# EAGLE board PIC32 dev board (EAGLE 6.5.0)
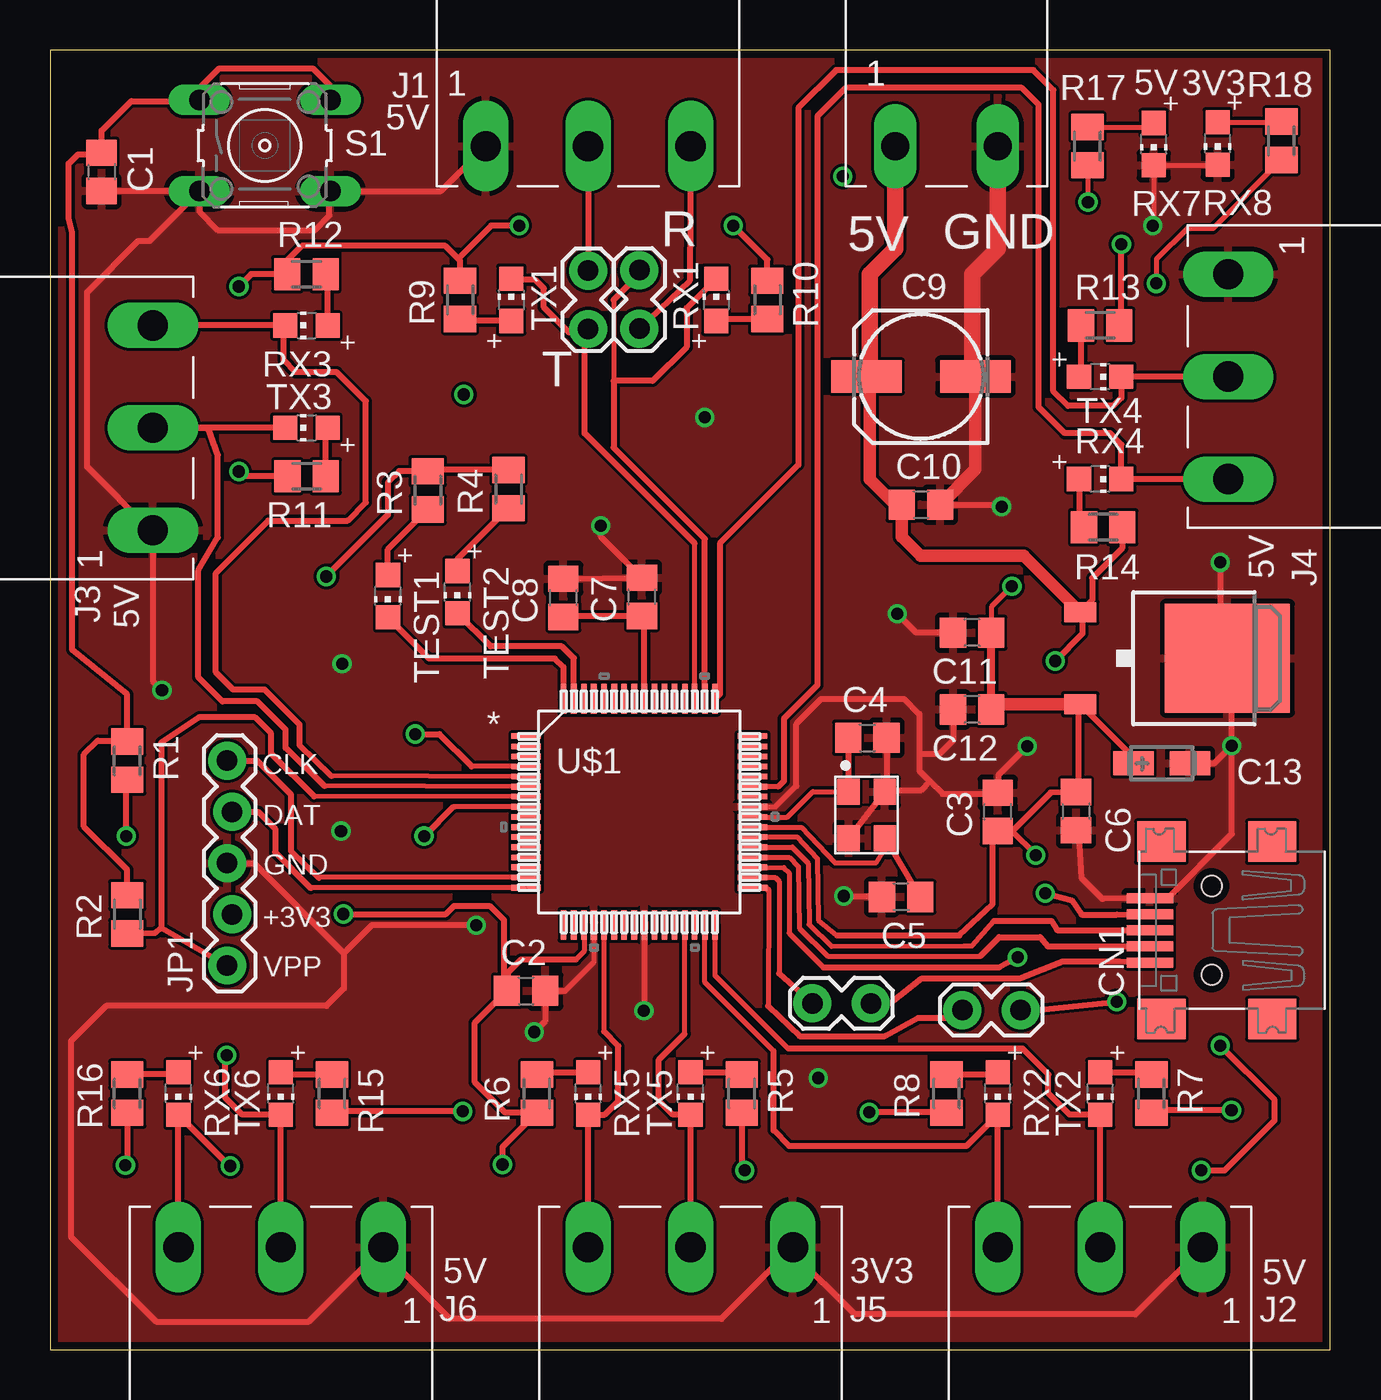
[diagram p0: board, top side]
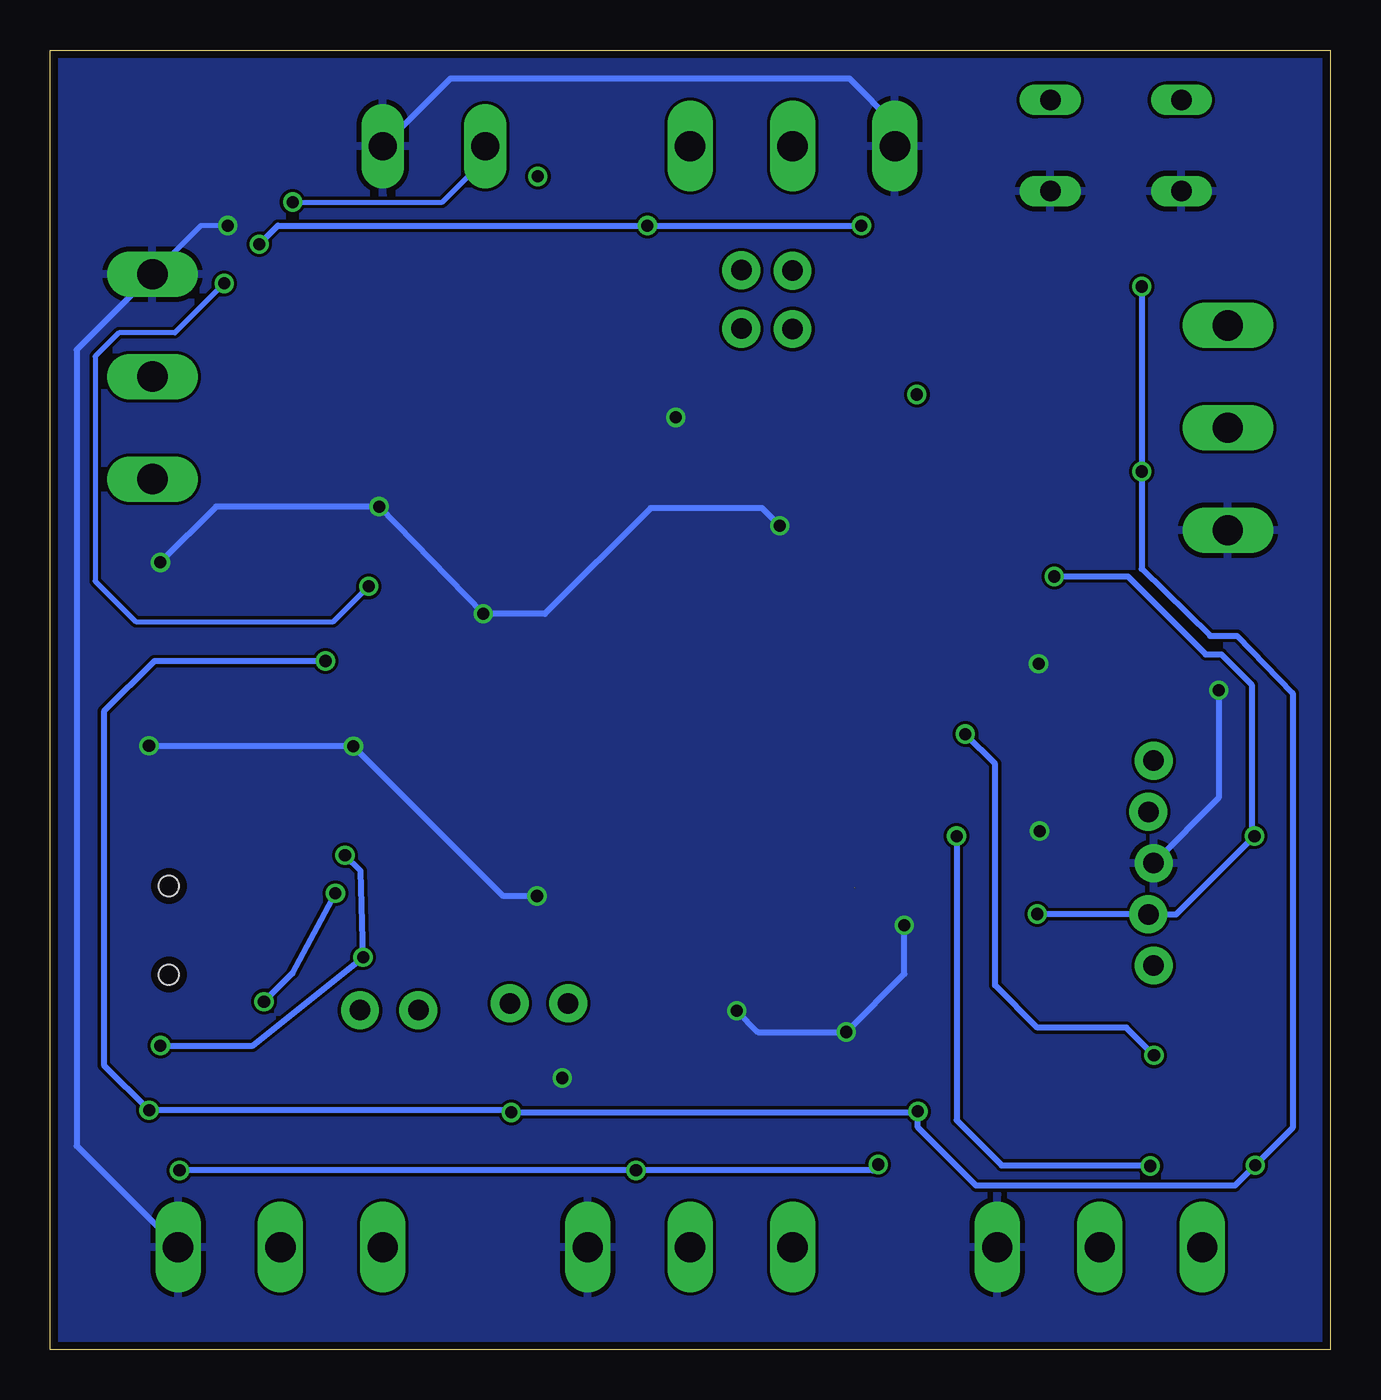
[diagram p1: board, bottom side, seen from below]

Size 63.48 x 64.44 mm. Coordinates in mm from the lower left corner, seen from the top.
Outline: 0,0 63.48,0 63.48,64.44 0,64.44 0,0
Copper layers (1*16): Top 0.0356mm / dielectric 1.5011mm / Bottom 0.0356mm
Design rules "LaenPCBOrder": minimum track width 6mil, minimum drill 13mil, track to track 6mil, track to pad 6mil, pad to pad 6mil, via to via 6mil, smd to smd 6mil, copper to edge 15mil, drill to drill 6mil, minimum pad ring 7mil, minimum via ring 7mil, stop-mask expansion 3mil, vias tented up to drill 0mil, thermal gap 10mil

## Footprints (pad centres in the part's own frame; a part is rotated, then mirrored left to right if it is on the bottom)
C0805 = smd 1.3 x 1.5: 1 -0.95,0; 2 0.95,0
153CLV-0605 = smd 3.5 x 1.6: + 2.7,0; - -2.7,0
CT3216 = smd 2 x 1.2: + -1.4,0; - 1.4,0
USB-MINIB = smd 0.5 x 2.308: D+ 0,4.064; D- -0.8,4.064; GND 1.6,4.064; ID 0.8,4.064; VBUS -1.6,4.064 | smd 2 x 2.4: GND1 -4.4,-2; GND2 -4.4,3.5; GND3 4.4,3.5; GND4 4.4,-2 | hole 1: -2.2,1; 2.2,1
ECX-32 = smd 1.3 x 1.1: 1 -1.15,-0.9; 2 1.15,-0.9; 3 1.15,0.9; 4 -1.15,0.9
M3 = drill 1.5 long: 1 -5.08,0; 2 0,0; 3 5.08,0
M2 = drill 1.4 long: 1 -2.54,0; 2 2.54,0
1X05_LOCK = drill 1.016 pad 1.88: 1 0,0.127; 2 2.54,-0.127; 3 5.08,0.127; 4 7.62,-0.127; 5 10.16,0.127
1X02_LOCK = drill 1.016 pad 1.88: 1 -0.178,0; 2 2.718,0
M0805 = smd 1.3 x 1.6: 1 -0.95,0; 2 0.95,0
CHIP-LED0805 = smd 1.2 x 1.2: A 0,-1.05; C 0,1.05
B3F-10XX = drill 1.016 long: 1 -3.251,2.261; 2 3.251,2.261; 3 -3.251,-2.261; 4 3.251,-2.261
TQFP64_10X10MC = smd 1.473 x 0.279: 1 -5.613,3.759; 2 -5.613,3.251; 3 -5.613,2.743; 4 -5.613,2.261; 5 -5.613,1.753; 6 -5.613,1.245; 7 -5.613,0.762; 8 -5.613,0.254; 9 -5.613,-0.254; 10 -5.613,-0.762; 11 -5.613,-1.245; 12 -5.613,-1.753; 13 -5.613,-2.261; 14 -5.613,-2.743; 15 -5.613,-3.251; 16 -5.613,-3.759; 33 5.613,-3.759; 34 5.613,-3.251; 35 5.613,-2.743; 36 5.613,-2.261; 37 5.613,-1.753; 38 5.613,-1.245; 39 5.613,-0.762; 40 5.613,-0.254; 41 5.613,0.254; 42 5.613,0.762; 43 5.613,1.245; 44 5.613,1.753; 45 5.613,2.261; 46 5.613,2.743; 47 5.613,3.251; 48 5.613,3.759 | smd 0.279 x 1.473: 17 -3.759,-5.613; 18 -3.251,-5.613; 19 -2.743,-5.613; 20 -2.261,-5.613; 21 -1.753,-5.613; 22 -1.245,-5.613; 23 -0.762,-5.613; 24 -0.254,-5.613; 25 0.254,-5.613; 26 0.762,-5.613; 27 1.245,-5.613; 28 1.753,-5.613; 29 2.261,-5.613; 30 2.743,-5.613; 31 3.251,-5.613; 32 3.759,-5.613; 49 3.759,5.613; 50 3.251,5.613; 51 2.743,5.613; 52 2.261,5.613; 53 1.753,5.613; 54 1.245,5.613; 55 0.762,5.613; 56 0.254,5.613; 57 -0.254,5.613; 58 -0.762,5.613; 59 -1.245,5.613; 60 -1.753,5.613; 61 -2.261,5.613; 62 -2.743,5.613; 63 -3.251,5.613; 64 -3.759,5.613
TO-252 = smd 5.4 x 6.2: GROUND 0,2.5 | smd 1 x 1.6: INPUT -2.28,-4.8; OUTPUT 2.28,-4.8

## Placement (x,y rotation side)
C1  0.1 uF ceramic 50v  [C0805]  2.54,58.42 270 top
C2  0.1 uF ceramic 50v  [C0805]  23.59,17.8 0 top
C3  0.1 uF ceramic 50v  [C0805]  46.99,26.67 90 top
C4  30 pF ceramic 50v  [C0805]  40.52,30.34 0 top
C5  30 pF ceramic 50v  [C0805]  42.2,22.45 180 top
C6  0.1 uF ceramic 50v  [C0805]  50.87,26.71 270 top
C7  0.1 uF ceramic 50v  [C0805]  29.34,37.33 90 top
C8  optional 10 uF ceramic 50v  [C0805]  25.44,37.29 90 top
C9  100 uF aluminum 16v  [153CLV-0605]  43.18,48.26 180 top
C10  0.1 uF ceramic 50v  [C0805]  43.18,41.91 0 top
C11  0.1 uF ceramic 50v  [C0805]  45.72,35.56 180 top
C12  optional 0.1 uF ceramic 50v  [C0805]  45.72,31.75 180 top
C13  10uF tantilum 16v  [CT3216]  55.12,29.08 0 top
CN1  [USB-MINIB]  58.6,20.8 90 top
ECS-240-20-33-TR  CRYSTAL  [ECX-32]  40.49,26.52 270 top
J1  EUROMAG-390DEG  [M3]  26.67,59.69 0 top
J2  EUROMAG-390DEG  [M3]  52.07,5.08 180 top
J3  EUROMAG-390DEG  [M3]  5.08,45.72 90 top
J4  EUROMAG-390DEG  [M3]  58.42,48.26 270 top
J5  EUROMAG-390DEG  [M3]  31.75,5.08 180 top
J6  EUROMAG-390DEG  [M3]  11.43,5.08 180 top
J7  EUROMAG-290DEG  [M2]  44.45,59.69 0 top
JP1  [1X05_LOCK]  8.89,19.05 90 top
JP2  M02LOCK  [1X02_LOCK]  47.95,16.84 180 top
JP3  M02LOCK  [1X02_LOCK]  29.21,50.82 90 top
JP4  M02LOCK  [1X02_LOCK]  26.67,53.34 270 top
JP5  M02LOCK  [1X02_LOCK]  40.51,17.17 180 top
R1  10K  [M0805]  3.81,29.21 270 top
R2  499R  [M0805]  3.81,21.59 90 top
R3  330R  [M0805]  18.72,42.62 90 top
R4  330R  [M0805]  22.72,42.68 90 top
R5  665R  [M0805]  34.29,12.7 270 top
R6  665R  [M0805]  24.13,12.7 270 top
R7  1K  [M0805]  54.61,12.7 270 top
R8  1K  [M0805]  44.45,12.7 270 top
R9  1K  [M0805]  20.32,52.07 90 top
R10  1K  [M0805]  35.56,52.07 90 top
R11  1K  [M0805]  12.71,43.32 180 top
R12  1K  [M0805]  12.7,53.34 180 top
R13  1K  [M0805]  52.07,50.8 0 top
R14  1K  [M0805]  52.21,40.79 0 top
R15  1K  [M0805]  13.97,12.7 270 top
R16  1K  [M0805]  3.81,12.7 270 top
R17  1K  [M0805]  51.44,59.69 270 top
R18  665R  [M0805]  61.06,59.96 270 top
RX1  Green  [CHIP-LED0805]  33.02,52.07 0 top
RX2  Green  [CHIP-LED0805]  46.99,12.7 180 top
RX3  Green  [CHIP-LED0805]  12.7,50.8 90 top
RX4  Green  [CHIP-LED0805]  52.07,43.18 270 top
RX5  Green  [CHIP-LED0805]  26.67,12.7 180 top
RX6  Green  [CHIP-LED0805]  6.35,12.7 180 top
RX7  Green  [CHIP-LED0805]  54.72,59.79 180 top
RX8  Green  [CHIP-LED0805]  57.89,59.82 180 top
S1  [B3F-10XX]  10.64,59.73 0 top
TEST1  Blue  [CHIP-LED0805]  16.74,37.37 180 top
TEST2  Blue  [CHIP-LED0805]  20.19,37.57 180 top
TX1  Red  [CHIP-LED0805]  22.86,52.07 0 top
TX2  Red  [CHIP-LED0805]  52.07,12.7 180 top
TX3  Red  [CHIP-LED0805]  12.7,45.72 90 top
TX4  Red  [CHIP-LED0805]  52.07,48.26 270 top
TX5  Red  [CHIP-LED0805]  31.75,12.7 180 top
TX6  Red  [CHIP-LED0805]  11.43,12.7 180 top
U$1  PIC32MX575F512H-X_PT  [TQFP64_10X10MC]  29.21,26.67 0 top
U$2  LP2950  [TO-252]  55.88,34.29 270 top

## Library data of the parts
C1-C13 R1-R18 = rcl
CN1 RX1-RX8 TEST1 TEST2 TX1-TX6 = adafruit
ECS-240-20-33-TR = Crystal ECS
J1-J7 U$2 = NASA_LIB
JP1-JP5 = SparkFun-Connectors
S1 = switch-omron; MPN: B3F-1000; OC_FARNELL: 176432; OC_NEWARK: 36M3542
U$1 = Pic32

## Nets
+3V3: C2.1 C3.1 C6.1 C11.1 C12.1 C13.+ JP1.2 R1.2 R3.2 R4.2 R5.2 R6.2 R18.2 U$1.19 U$1.35 U$1.38 U$2.OUTPUT
+5V: C9.+ C10.1 J7.1 R7.2 R8.2 R9.2 R10.2 R11.2 R12.2 R13.2 R14.2 R15.2 R16.2 R17.2 U$2.INPUT
GND: C1.2 C2.2 C3.2 C4.2 C5.2 C6.2 C7.2 C8.2 C9.- C10.2 C11.2 C12.2 C13.- CN1.GND ECS-240-20-33-TR.2 ECS-240-20-33-TR.4 J1.1 J2.1 J3.1 J4.1 J5.1 J6.1 J7.2 JP1.3 RX7.C RX8.C S1.3 S1.4 U$1.20 U$1.25 U$1.41 U$2.GROUND
N$1: J5.2 TX5.C U$1.29
N$2: J5.3 RX5.C U$1.21
N$3: J1.2 JP4.1
N$4: J1.3 JP3.1
N$5: J4.2 TX4.C U$1.49
N$6: JP3.2 RX1.C U$1.50
N$7: J2.2 TX2.C U$1.32
N$8: J2.3 RX2.C U$1.31
N$9: J3.2 TX3.C U$1.6
N$10: J3.3 RX3.C U$1.5
N$11: J6.2 TX6.C U$1.4
N$12: J6.3 RX6.C U$1.8
N$13: JP1.1 R2.1 U$1.7
N$14: JP1.4 U$1.16
N$15: JP1.5 U$1.15
N$16: C1.1 R1.1 R2.2 S1.1 S1.2
N$17: C7.1 C8.1 U$1.56
N$18: C4.1 ECS-240-20-33-TR.1 U$1.40
N$19: C5.1 ECS-240-20-33-TR.3 U$1.39
N$20: CN1.D+ U$1.37
N$21: CN1.D- U$1.36
N$22: CN1.VBUS JP5.1
N$23: CN1.ID JP2.1
N$24: TEST2.C U$1.63
N$25: TEST1.C U$1.64
N$26: R3.1 TEST1.A
N$27: R4.1 TEST2.A
N$28: R5.1 TX5.A
N$29: R6.1 RX5.A
N$30: R7.1 TX2.A
N$31: R8.1 RX2.A
N$32: R9.1 TX1.A
N$33: R10.1 RX1.A
N$34: R11.1 TX3.A
N$35: R12.1 RX3.A
N$36: R13.1 TX4.A
N$37: R14.1 RX4.A
N$38: R15.1 TX6.A
N$39: R16.1 RX6.A
N$40: JP2.2 U$1.33
N$41: JP4.2 TX1.C U$1.51
N$42: J4.3 RX4.C U$1.43
N$43: JP5.2 U$1.34
N$46: R17.1 RX7.A
N$47: R18.1 RX8.A

## Tracks (layer width: path | path; a pad name or v marks a point on that pad's centre or on a via)
+3V3  (via drill 0.6)
  Top 0.254: U$1.38 37.02,25.43 38.04,24.35 38.09,21.3 39,20.54 | U$1.35 36.38,23.91 36.64,23.66 36.64,20.65 38.34,18.96 | U$1.19 26.47,19.75 26.07,19.35 | R18.2 57.65,55.6 56.38,55.6 54.86,54.08 v54.86,52.88 | v47.69,37.86 46.67,36.84 C11.1
  Top 0.305: 39,20.54 45.09,20.54 46.74,22.09 46.74,25.47 C3.1 47.71,25.72 | 47.71,25.72 49.61,27.62 C6.1 50.98,27.8 50.98,31.92 U$2.OUTPUT 53.72,29.37 C13.+ | 38.34,18.96 47.05,18.96 v47.97,19.46 | v48.87,24.52 48.87,24.56 47.71,25.72 | 26.07,19.35 23.34,19.35 22.68,18.69 22.68,17.84 C2.1 | v3.76,25.47 3.76,28.21 R1.2 | v22.42,9.18 22.42,10.04 R6.2 22.57,11.75 21.05,13.26 21.05,16.21 C2.1 | v57.08,8.89 58.24,8.89 60.72,11.36 60.72,12.38 v58.02,15.08 | R5.2 34.29,9.03 v34.44,8.89 | v14.53,21.6 19.62,21.6 20.03,22.01 21.79,22.01 22.49,21.31 22.49,17.95 C2.1 | R4.2 18.78,43.63 R3.2 17.3,43.57 16.74,43.01 16.74,41.4 v13.69,38.35
  Top 0.406: 46.93,32.01 46.67,32.27 C11.1
  Top 0.61: U$2.OUTPUT 46.93,32.01 C12.1
  Bottom 0.254: v54.86,52.88 57.31,50.43 60.09,50.43 61.26,49.26 61.26,38.12 59.24,36.1 49.45,36.1 v47.69,37.86
  Bottom 0.305: v48.87,24.52 48.1,23.74 v47.97,19.46 53.44,15.08 v58.02,15.08 | v22.42,9.18 22.71,8.89 v34.44,8.89 v57.08,8.89 | v14.53,21.6 v14.52,21.59 JP1.2 7.64,21.59 v3.76,25.47 3.9,25.61 3.9,32.98 5.4,34.49 6.18,34.49 10.04,38.35 v13.69,38.35
+5V  (via drill 0.6)
  Top 0.254: R17.2 51.46,58.72 v51.46,56.92
  Top 0.305: R14.2 53.16,39.76 51.67,38.27 51.67,37.16 U$2.INPUT 51.19,36.57 51.19,35.51 v49.84,34.15 | v58.59,11.87 54.73,11.87 R7.2 | R8.2 44.45,11.77 v40.62,11.77 | v20.45,11.81 14.03,11.81 R15.2 | R16.2 3.81,9.23 v3.72,9.14 | v9.35,52.73 9.96,53.34 R12.2 11.75,54.02 12.47,54.74 19.59,54.74 20.22,54.11 | R11.2 9.58,43.32 v9.35,43.55 | R9.2 20.32,54.01 20.22,54.11 | R10.2 35.56,54.06 v33.87,55.75 | v23.25,55.75 21.86,55.75 20.22,54.11 | R13.2 53.12,50.8 v53.12,54.82
  Top 0.61: C9.+ 40.64,48.1 40.64,43.18 41.91,41.91 C10.1 42.23,40.32 43.18,39.37 48.28,39.37 U$2.INPUT 51.12,36.61
  Top 0.813: J7.1 41.91,54.61 40.64,53.34 40.64,48.42 C9.+
  Bottom 0.254: v51.46,56.92 44.04,56.92 41.91,59.05 J7.1
  Bottom 0.305: v49.84,34.15 58.33,34.15 60.82,31.65 60.82,14.11 v58.59,11.87 40.62,11.87 v40.62,11.77 20.5,11.77 v20.45,11.81 20.45,11.02 17.56,8.13 4.73,8.13 v3.72,9.14 1.87,10.99 1.87,32.56 4.61,35.41 5.96,35.41 9.35,38.73 v9.35,43.55 v9.35,52.73 | v23.25,55.75 v33.87,55.75 52.19,55.75 v53.12,54.82
GND  (via drill 0.6)
  Top 0.254: U$1.41 35.95,26.92 37,27.97 | 25.53,17.8 26.95,19.21 26.95,19.22 U$1.20 | v54.68,55.75 54.72,55.79 RX7.C 57.86,58.74 RX8.C
  Top 0.305: 37,27.97 37,31.04 38.23,32.27 42.35,32.27 43.1,31.52 43.1,29.62 | 43.1,29.62 43.1,28.72 43.62,28.2 | 43.62,28.2 44.25,27.57 46.94,27.57 C3.2 46.99,27.53 47.03,27.49 47.03,28.51 v48.45,29.93 | C4.2 41.47,27.75 | 41.47,27.75 ECS-240-20-33-TR.4 ECS-240-20-33-TR.2 | 41.47,27.75 43.18,27.75 43.62,28.2 | C12.2 44.77,30.22 44.08,29.53 43.18,29.53 43.1,29.62 | C6.2 51.04,25.48 51.16,23.37 52.17,22.36 CN1.GND 55.42,22.4 58.6,25.58 58.6,29.94 v58.59,29.95 | 58.36,33.73 58.36,34.22 58.38,34.24 U$2.GROUND 58.02,34.65 v58.02,39.05 | 58.36,33.73 58.36,33.38 58.14,33.38 | v58.59,29.95 58.59,33.51 58.36,33.73 | 25.53,17.8 C2.2 24.54,16.29 v24,15.75 | C1.2 S1.3 | S1.3 7.38,56.46 8.31,55.53 13.12,55.53 13.84,56.25 13.84,57.42 S1.4 19.37,57.47 J1.1 | S1.3 4.92,55 4.37,55 1.82,52.45 1.82,43.78 4.96,40.64 J3.1 5.08,33.16 v5.53,32.71 | JP1.3 10.1,24.13 14.56,19.67 | 14.56,19.67 14.56,17.92 13.69,17.05 2.77,17.05 1.02,15.3 1.02,5.61 5.24,1.38 12.81,1.38 J6.1 16.51,4.82 19.8,1.53 33.28,1.53 J5.1 36.83,4.82 39.9,1.75 53.82,1.75 J2.1 | C10.2 47.08,41.91 v47.18,41.81 | C11.2 42.94,35.56 v42.01,36.5 | C8.2 C7.2 27.3,40.32 v27.3,40.87 | v21.12,21.05 15.94,21.05 14.56,19.67 | U$1.25 29.46,16.83 v29.44,16.8 | C5.2 39.34,22.45 v39.34,22.5 | C13.- 57.72,29.08 v58.59,29.95
  Top 0.61: C9.- 45.88,43.66 C10.2
  Top 0.813: J7.2 46.99,54.61 45.72,53.34 45.72,48.42 C9.-
  Bottom 0.254: v54.68,55.75 56.01,55.75 J4.1
  Bottom 0.305: v58.59,29.95 58.57,29.93 v48.45,29.93 41.02,22.5 v39.34,22.5 | v5.53,32.71 5.53,27.36 JP1.3 | J4.1 62.17,49.59 62.17,10.11 J2.1 | v58.02,39.05 55.26,41.81 v47.18,41.81 v42.01,36.5 38.95,36.5 33.71,41.74 28.18,41.74 v27.3,40.87 | v21.12,21.05 21.12,18.63 v24,15.75 28.39,15.75 v29.44,16.8 | J1.1 21.59,60.78 23.84,63.03 43.65,63.03 J7.2
  other vias: 14.47,34.02 32.46,46.24 14.41,25.72 38.09,13.47
  pour Bottom: 0.37,64.15 0.37,0.3 63.16,0.3 63.16,64.07
  pour Top: 0.39,64.07 0.39,0.27 63.12,0.27 63.12,64.2 0.27,64.11 0.36,64.11
N$1
  Top 0.254: 31.46,15.66 31.46,21.05 U$1.29
  Top 0.305: J5.2 TX5.C 30.88,11.65 30.18,12.34 30.18,14.38 31.46,15.66
N$2
  Top 0.254: U$1.21 27.46,15.79 27.45,15.78
  Top 0.305: J5.3 RX5.C 27.5,11.65 28.17,12.32 28.17,15.05 27.45,15.78
N$3
  Top 0.305: J1.2 JP4.1
N$4
  Top 0.305: J1.3 31.71,53.01 JP3.1
N$5
  Top 0.305: J4.2 TX4.C 53.12,47.21 52.71,46.8 50.48,46.8 49.75,47.53 49.75,62.48 48.76,63.47 38.98,63.47 37.1,61.59 37.1,43.89 33.2,39.98 33.2,32.51 U$1.49
N$6
  Top 0.254: 27.94,52.07 27.94,48.04
  Top 0.305: JP3.2 29.21,53.34 27.94,52.07 | U$1.50 32.46,40.21 27.94,44.73 27.94,48.04 29.87,48.04 31.55,49.73 31.55,51.65 RX1.C
N$7
  Top 0.254: 36.6,14.92 32.97,18.55 U$1.32
  Top 0.305: J2.2 TX2.C 50.55,11.65 49.5,12.71 49.5,13.65 48.22,14.92 36.6,14.92
N$8
  Top 0.254: 35.87,14.8 32.46,18.23 32.46,20.99 U$1.31
  Top 0.305: J2.3 RX2.C 45.44,10.1 36.64,10.1 35.87,10.87 35.87,14.8
N$9
  Top 0.254: U$1.6 13.59,27.97
  Top 0.305: 13.59,27.97 11.67,29.84 11.67,30.75 10.26,32.16 8.53,32.16 7.33,33.35 7.33,38.66 8.31,40.29 8.31,44.37 7.84,45.7 5.67,45.7 | 5.67,45.7 5.1,45.7 J3.2 | TX3.C 5.69,45.72 5.67,45.7
N$10
  Top 0.254: U$1.5 13.93,28.45
  Top 0.305: 13.93,28.45 12.36,29.99 12.36,31 10.62,32.73 9.07,32.73 8.2,33.6 8.2,38.51 10.8,41.12 14.74,41.12 15.64,42.02 15.64,47.04 14.2,48.49 12.14,48.49 11.56,49.06 11.56,50.71 RX3.C J3.3
N$11  (via drill 0.6)
  Top 0.254: U$1.4 20.89,28.93
  Top 0.305: J6.2 TX6.C 9.52,11.65 8.67,12.5 8.67,14.52 v8.74,14.6 | v18.1,30.53 19.29,30.53 20.89,28.93
  Bottom 0.305: v8.74,14.6 10.12,15.97 14.53,15.97 16.62,18.07 16.62,29.05 v18.1,30.53
N$12  (via drill 0.6)
  Top 0.254: U$1.8 19.99,26.92
  Top 0.305: J6.3 RX6.C 8.89,9.11 v8.92,9.11 | 19.99,26.92 v18.54,25.47
  Bottom 0.305: v18.54,25.47 18.54,11.38 16.3,9.14 8.96,9.14 v8.92,9.11
N$13
  Top 0.254: U$1.7 13.09,27.44
  Top 0.305: 13.09,27.44 10.95,29.55 10.95,30.57 10.15,31.36 7.37,31.36 5.49,30.1 5.49,20.91 | 5.49,20.91 JP1.1 | R2.1 5.22,20.68 5.49,20.91
N$14  (1 unrouted)
  Top 0.254: U$1.16 12.93,22.91 12.91,22.89
  Top 0.305: JP1.4 10.3,26.67 11.14,25.82 11.14,24.68 12.91,22.89
N$15
  Top 0.254: 13.33,23.38 13.3,23.41 13.3,23.42 U$1.15
  Top 0.305: JP1.5 10.26,29.21 11.93,27.54 11.93,24.73 13.3,23.41
N$16
  Top 0.305: R2.2 3.81,23.79 1.66,25.94 1.66,29.52 2.35,30.2 3.77,30.2 R1.1 3.81,32.5 1.08,34.72 1.08,55.42 0.9,56.11 0.9,58.82 1.37,59.29 2.46,59.29 C1.1 2.54,60.45 4.01,61.93 7.32,61.93 S1.1 7.38,62.55 8.38,63.55 13.01,63.55 13.87,62.69 13.87,62 S1.2
N$17
  Top 0.305: U$1.56 29.46,36.26 C7.1 25.49,36.38 C8.1
N$18
  Top 0.254: U$1.40 36.55,26.42 37.81,27.67 ECS-240-20-33-TR.1
  Top 0.305: C4.1 39.59,30.33 ECS-240-20-33-TR.1
N$19
  Top 0.254: U$1.39 37.25,25.91 38.92,24.14 40.96,24.16 41.34,24.75
  Top 0.305: 41.34,24.75 41.34,25.33 ECS-240-20-33-TR.3 41.49,25.26 C5.1
N$20
  Top 0.254: U$1.37 36.81,24.92 37.58,24.12 37.64,21.09 38.75,20 45.32,20.02 45.71,20.02 46.81,21.26
  Top 0.305: 46.81,21.26 49.65,21.26 49.93,20.8 54.44,20.8 CN1.D+
N$21
  Top 0.254: U$1.36 36.65,24.41 37.1,23.95 37.15,20.91 38.56,19.52 46.12,19.52
  Top 0.305: 46.12,19.52 47.05,20.45 49.09,20.45 49.48,20 CN1.D-
N$22
  Top 0.305: JP5.1 41.69,17.22 43.23,18.41 48.08,18.41 50.22,19.26 53.02,19.26 CN1.VBUS
N$23  (via drill 0.6)
  Top 0.305: JP2.1 48.82,16.84 v52.89,17.26 | v49.34,22.64 50.66,22.28 51.15,21.58 52.9,21.58 CN1.ID
  Bottom 0.305: v49.34,22.64 51.48,18.66 v52.89,17.26
N$24
  Top 0.305: U$1.63 25.96,34.3 25.37,34.88 21.83,34.88 TEST2.C
N$25
  Top 0.305: U$1.64 25.45,33.85 25.02,34.28 18.79,34.28 TEST1.C
N$26
  Top 0.305: TEST1.A 16.74,39.7 R3.1
N$27
  Top 0.305: TEST2.A 20.19,39.2 R4.1
N$28
  Top 0.305: TX5.A 34.19,13.75 R5.1
N$29
  Top 0.305: RX5.A 26.62,13.75 26.59,13.72 24.2,13.72 R6.1
N$30
  Top 0.305: TX2.A 54.51,13.75 R7.1
N$31
  Top 0.305: R8.1 46.89,13.65 RX2.A
N$32
  Top 0.305: TX1.A 20.42,51.02 R9.1
N$33
  Top 0.305: RX1.A 33.12,51.12 R10.1
N$34
  Top 0.305: R11.1 13.66,45.63 TX3.A
N$35
  Top 0.305: RX3.A 13.75,53.24 R12.1
N$36
  Top 0.305: TX4.A 51.05,48.26 51.05,48.42 51.12,48.42 R13.1
N$37
  Top 0.305: RX4.A 51.02,41.03 R14.1
N$38
  Top 0.305: TX6.A 11.53,13.65 R15.1
N$39
  Top 0.305: RX6.A 6.25,13.65 R16.1
N$40
  Top 0.254: U$1.33 35.49,22.91 | 35.62,22.78 35.6,17.04
  Top 0.305: 35.49,22.91 35.62,22.78 | 35.6,17.04 37.16,15.55 41.39,15.55 43.04,16.45 44.84,16.45 JP2.2
N$41
  Top 0.254: U$1.51 31.95,39.98
  Top 0.305: 31.95,39.98 26.49,45.44 26.49,50.45 | 26.49,50.45 JP4.2 | 26.49,50.45 25.74,50.45 24.48,51.71 24.48,52.63 24.05,53.05 22.93,53.05 TX1.C
N$42
  Top 0.254: 36.1,27.93 34.83,27.93 U$1.43
  Top 0.305: J4.3 RX4.C 53.12,44.89 52.56,45.45 50.32,45.45 49.02,46.75 49.02,61.75 48.19,62.58 39.45,62.58 38.04,61.17 38.04,32.95 36.37,31.29 36.37,28.2 36.1,27.93
N$43
  Top 0.254: U$1.34 35.94,23.42 36.14,23.22 36.14,18.64
  Top 0.305: 36.14,18.64 JP5.2
N$44  (via drill 0.6)
  other vias: 39.3,58.19
N$45  (via drill 0.6)
  other vias: 20.51,47.37
N$46
  Top 0.254: R17.1 54.72,60.64 RX7.A
N$47
  Top 0.254: RX8.A 61.06,60.87 R18.1

## Text on the board
tNames: 5V | 5V | 3V3 | R | GND | 5V | T | 5V | 5V | CLK | DAT | GND | +3V3 | VPP | 5V | 3V3 | 5V